# Altium PCB pcbMotores.PcbDoc
Units mm, origin at the board's own origin, x right, y up, seen from the top; angles counter-clockwise.
Board outline 24.59 x 32.45 mm, 2 copper layers (Top Layer, Bottom Layer); 8 components, 47 nets, 16 pads, 0 vias.
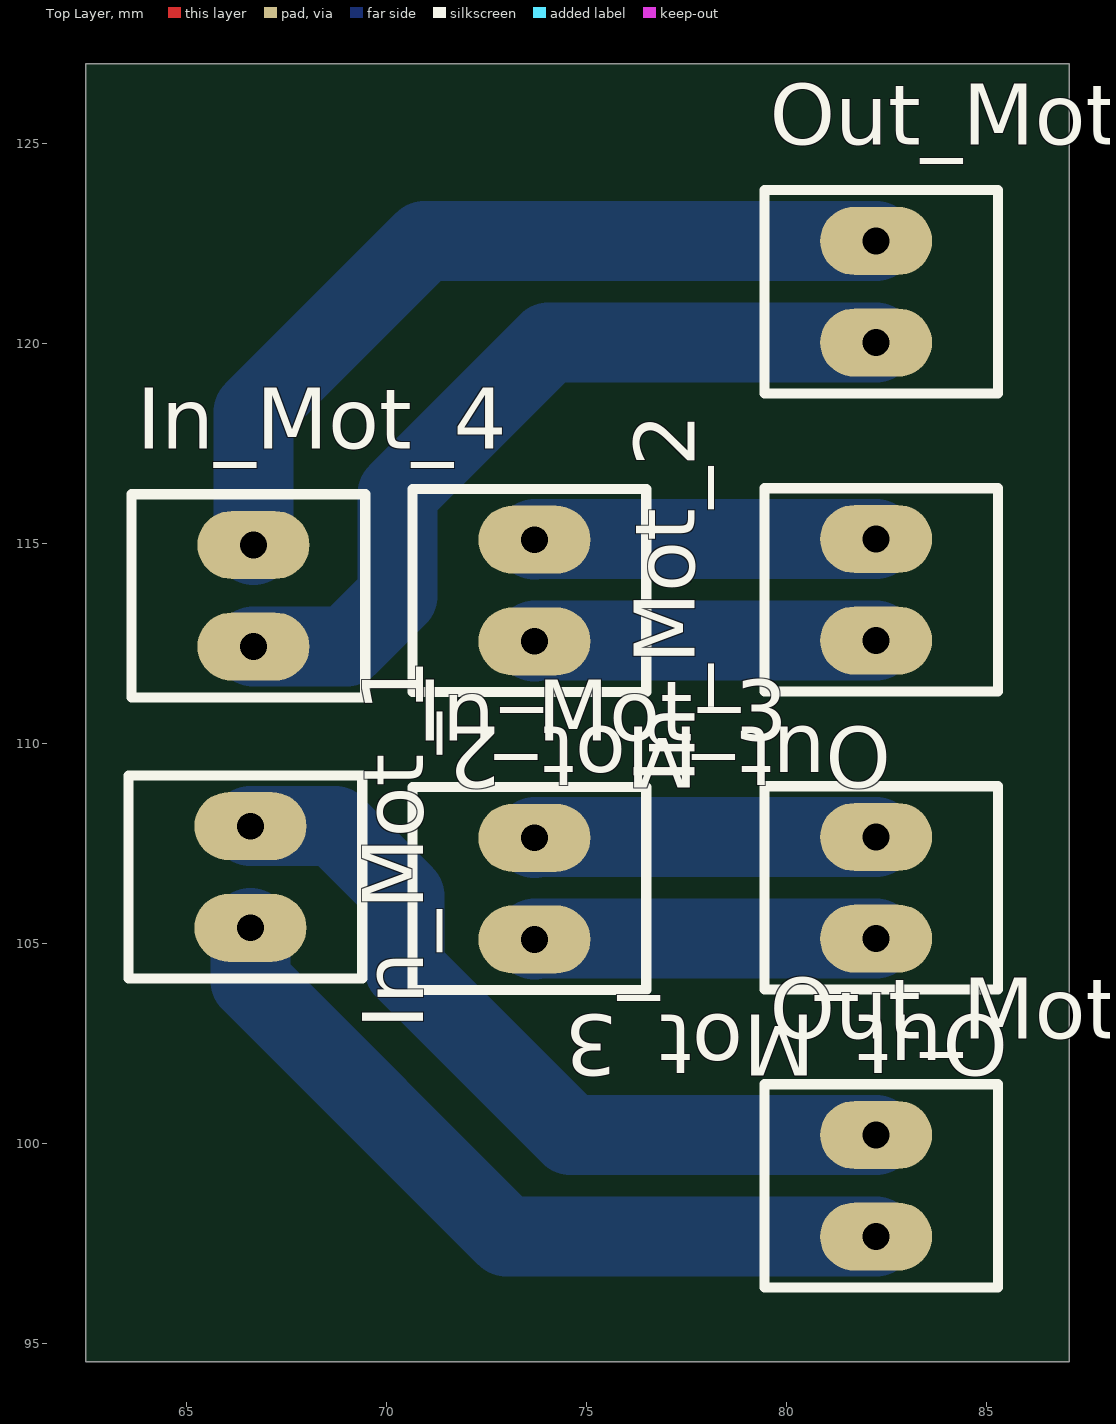
[diagram p0: Top Layer view]
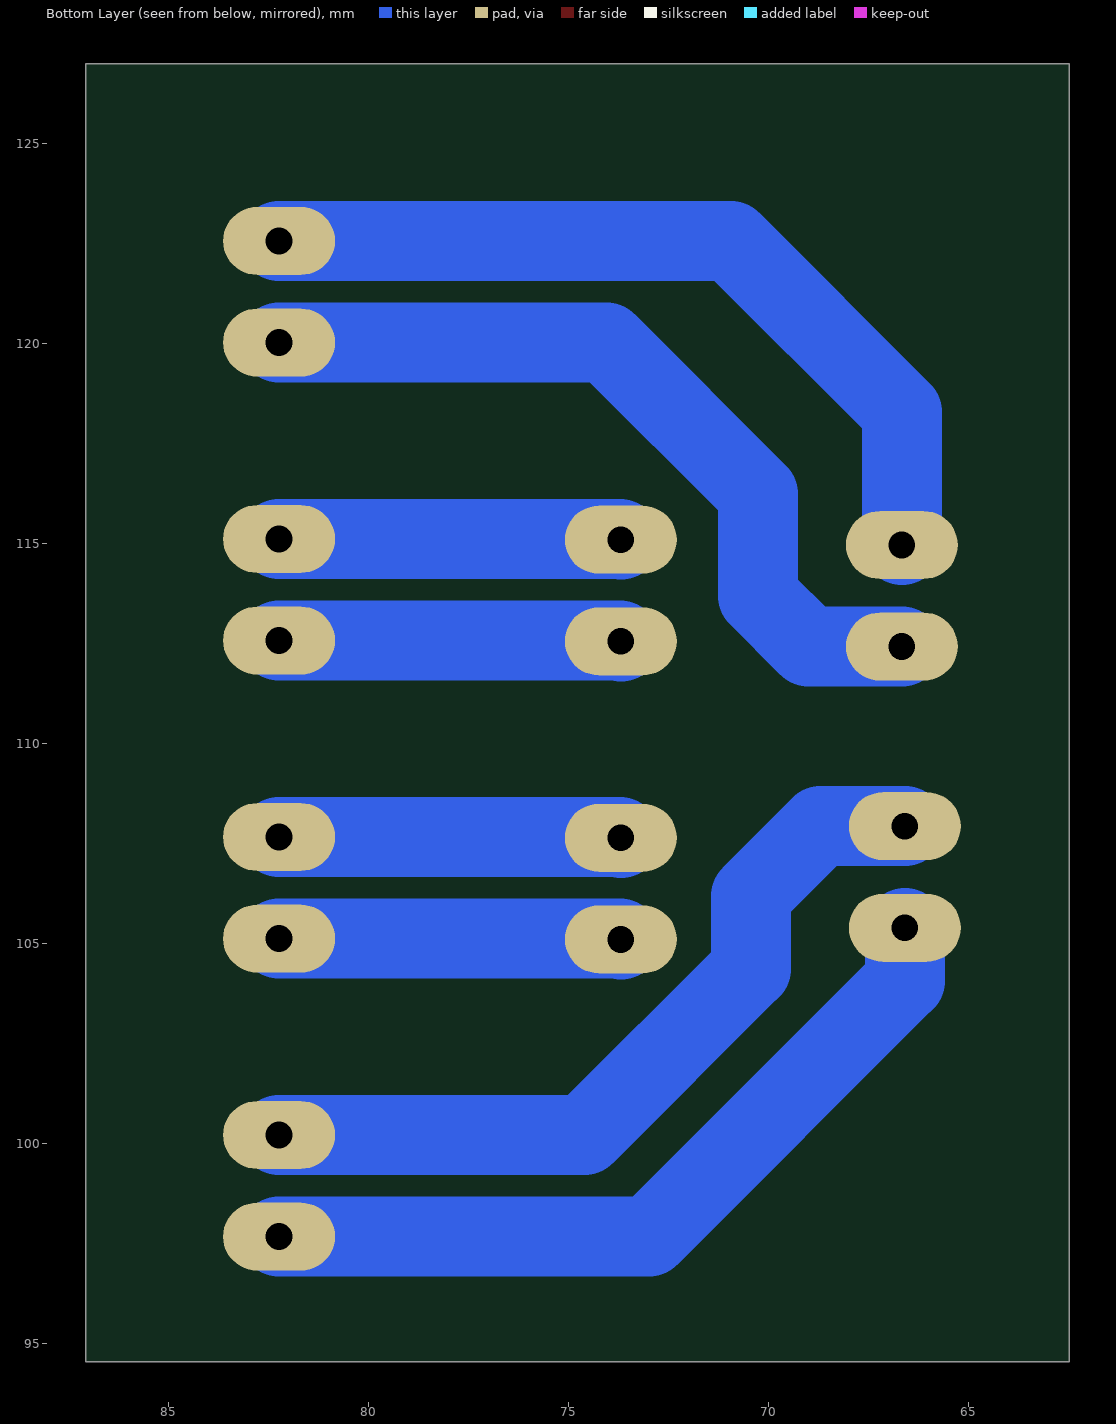
[diagram p1: Bottom Layer view, seen from below]
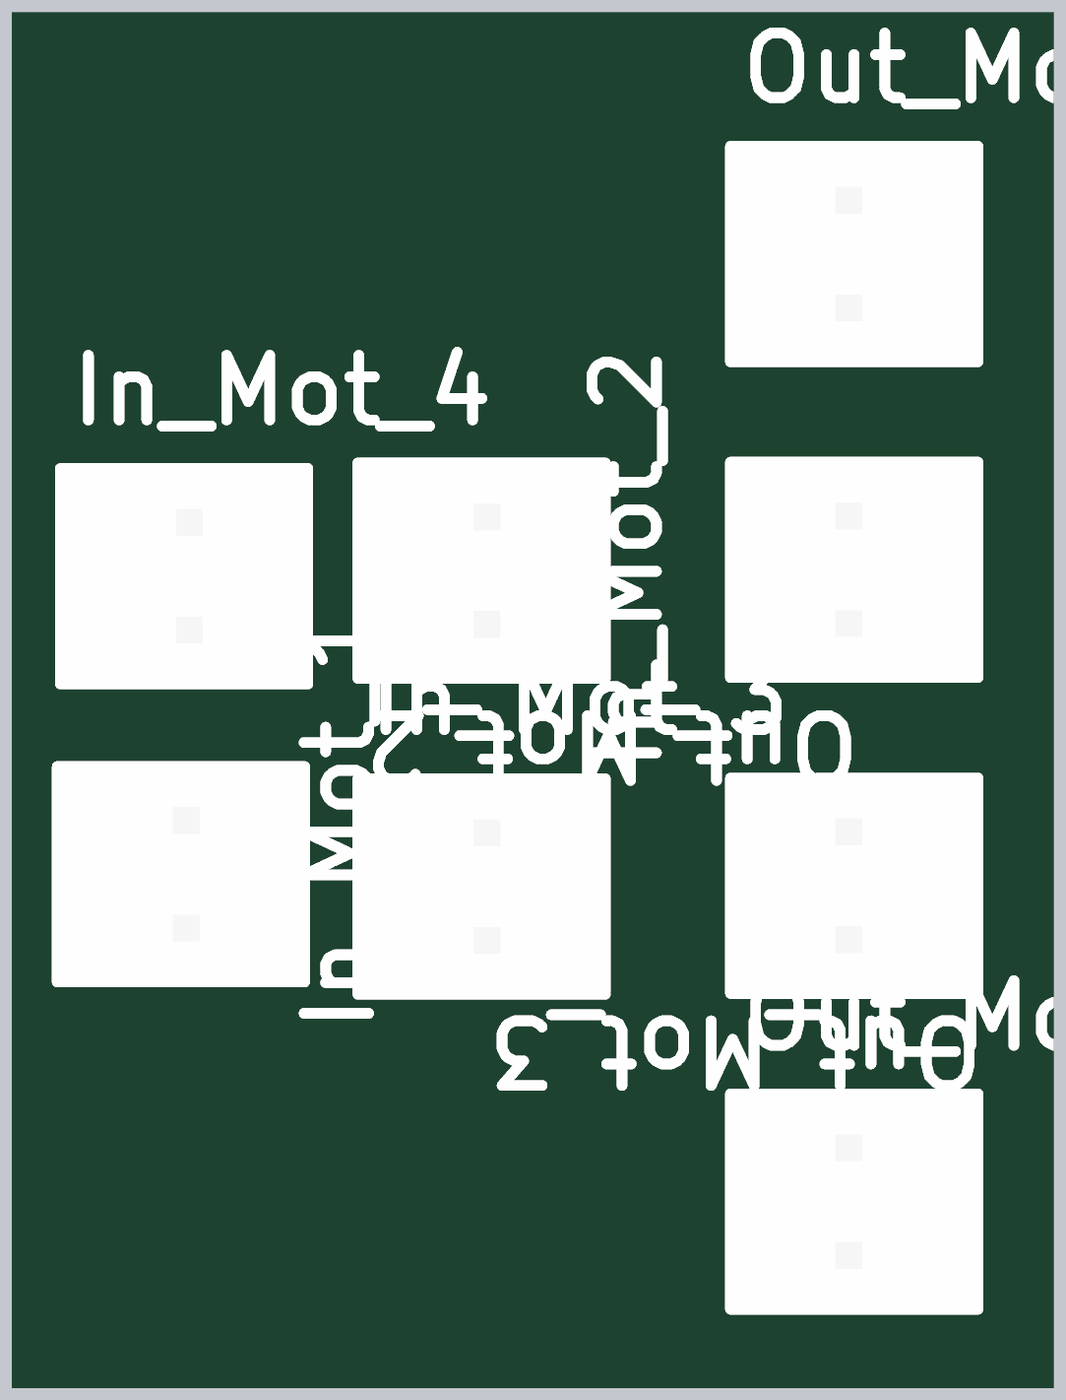
[diagram p2: 3D render of the assembled board from above, using the file's embedded part models]

## Layer stack, top to bottom
Top Solder: solder mask 0.0102, Solder Resist, Dk 3.5
Top Layer: signal copper 0.0356
Dielectric 1: dielectric 0.32, FR-4, Dk 4.8
Bottom Layer: signal copper 0.0356
Bottom Solder: solder mask 0.0102, Solder Resist, Dk 3.5

## Board outline
62.484,94.55 87.075,94.55 87.075,127 62.484,127

## Design rules (kind name [scope] priority, off if disabled: settings)
Clearance [All] p1: gap=0.254 ignorepadtopadclearanceinfootprint=FALSE except(0: Arc-Hole Track-Hole SMDPad-Hole THPad-Hole Via-Hole Fill-Hole Poly-Hole Region-Hole Text-Hole)
PolygonConnect [All] p1: connectstyle=Relief reliefconductorwidth=0.254 reliefentries=4 polygonreliefangle="90 Angle" airgapwidth=0.254
RoutingVias [All] p1: holewidth=0.711 width=1.27 viastyle="Through Hole" minholewidth=0.711 minwidth=1.27 maxholewidth=0.711 maxwidth=1.27
SolderMaskExpansion [All] p1: expansion=0.102
Width [All] p1: maxlimit=3 minlimit=0.254 preferedwidth=2
30 further rules are at their usual default settings.

## Components (designator, comment, footprint, x,y, rotation, side; value= is the part's Value field where it differs from the comment)
In_Mot_1 "KK2" 2-vias 66.6,106.67 r180 top
In_Mot_2 "KK2" 2-vias 73.7,113.831 r180 top
In_Mot_3 "KK2" 2-vias 73.7,106.381 r180 top
In_Mot_4 "KK2" 2-vias 66.675,113.7 r180 top
Out_Mot_1 "KK2" 2-vias 82.243,98.949 r0 top
Out_Mot_2 "KK2" 2-vias 82.243,113.85 r0 top
Out_Mot_3 "KK2" 2-vias 82.243,106.4 r0 top
Out_Mot_4 "KK2" 2-vias 82.243,121.301 r0 top

## Footprints (in the part's own frame and the unit in brackets; to place one, negate y for a bottom-side part, rotate by r counter-clockwise, add the part's x,y. Pads: shape width x height; smd on the part's side, far side on the other; paste and mask are expansions set on the pad)
2-vias [mm]
  oval 2.8x1.7 hole 0.67 unplated: 1(0,1.27) 2(0,-1.27)
  silkscreen extent -2.79,-2.54 3.05,2.54, body extent -2.87,-2.54 2.97,2.54, height 11.7

## Part data
In_Mot_1 In_Mot_2 In_Mot_3 In_Mot_4 Out_Mot_1 Out_Mot_2 Out_Mot_3 Out_Mot_4: library part KK2Vias

## Nets (pads, with @x,y where several pads share a name; then routed paths per layer and width w, separated by ;. In a path a pad name is that pad's centre, name@x,y a point inside that pad or via, vN(x,y) a via of type N, cw(c..) or ccw(c..) an arc to the next point about the centre after c; other vN are vias at no path point)
1A: 
1B: 
2A: 
2B: 
3.3v: 
5V: 
12V: 
ChA_1: 
ChA_2: 
ChA_3: 
ChA_4: 
ChB_1: 
ChB_2: 
ChB_3: 
ChB_4: 
CLK_1: 
CLK_2: 
DIR: 
EN: 
GND: 
MISO_2: 
MOSI_1: 
MOSI_2: 
MotA_1: In_Mot_1.1 Out_Mot_1.2 | length 19.6
  Bottom Layer w2: In_Mot_1.1 66.6,104.075 72.996,97.679 Out_Mot_1.2
MotA_2: In_Mot_1.2 Out_Mot_1.1 | length 19.9
  Bottom Layer w2: In_Mot_1.2 68.71,107.94 70.45,106.2 70.45,104.375 74.606,100.219 Out_Mot_1.1
MotB_1: In_Mot_2.1 Out_Mot_2.2 | length 8.6
  Bottom Layer w2: In_Mot_2.1 73.719,112.58 Out_Mot_2.2
MotB_2: In_Mot_2.2 Out_Mot_2.1 | length 8.6
  Bottom Layer w2: In_Mot_2.2 73.719,115.12 Out_Mot_2.1
MotC_1: In_Mot_3.1 Out_Mot_3.2 | length 8.6
  Bottom Layer w2: In_Mot_3.1 73.719,105.13 Out_Mot_3.2
MotC_2: In_Mot_3.2 Out_Mot_3.1 | length 8.6
  Bottom Layer w2: In_Mot_3.2 73.719,107.67 Out_Mot_3.1
MotD_1: In_Mot_4.1 Out_Mot_4.2 | length 20.2
  Bottom Layer w2: In_Mot_4.1 69.005,112.43 70.275,113.7 70.275,116.25 74.056,120.031 Out_Mot_4.2
MotD_2: In_Mot_4.2 Out_Mot_4.1 | length 20.7
  Bottom Layer w2: In_Mot_4.2 66.675,118.3 70.946,122.571 Out_Mot_4.1
MS1: 
MS2: 
MS3: 
NetC2_1: 
NetConv_3V_4: 
NetConv_5V_2: 
NetConv_5V_3: 
RST: 
Servo1: 
Servo2: 
Servo3: 
Servo4: 
SLP: 
SS_1: 
SS_2: 
STP: 